# EAGLE board T01_Synth_Glove_v6.1 (EAGLE 7.1.0)
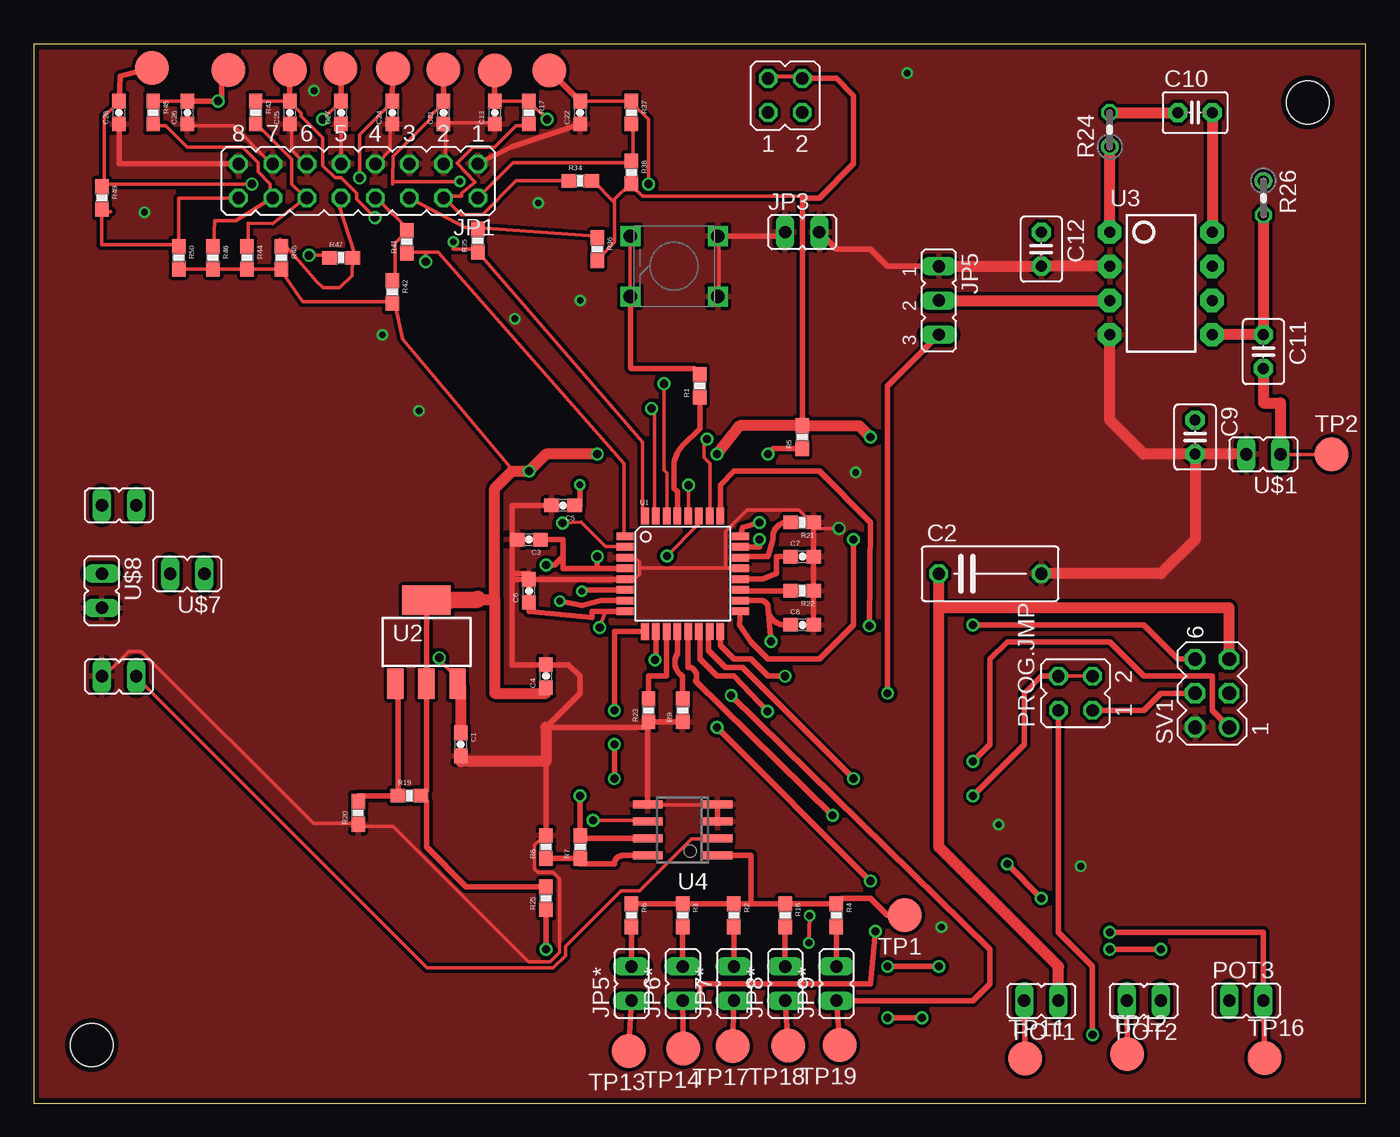
[diagram p0: board, top side]
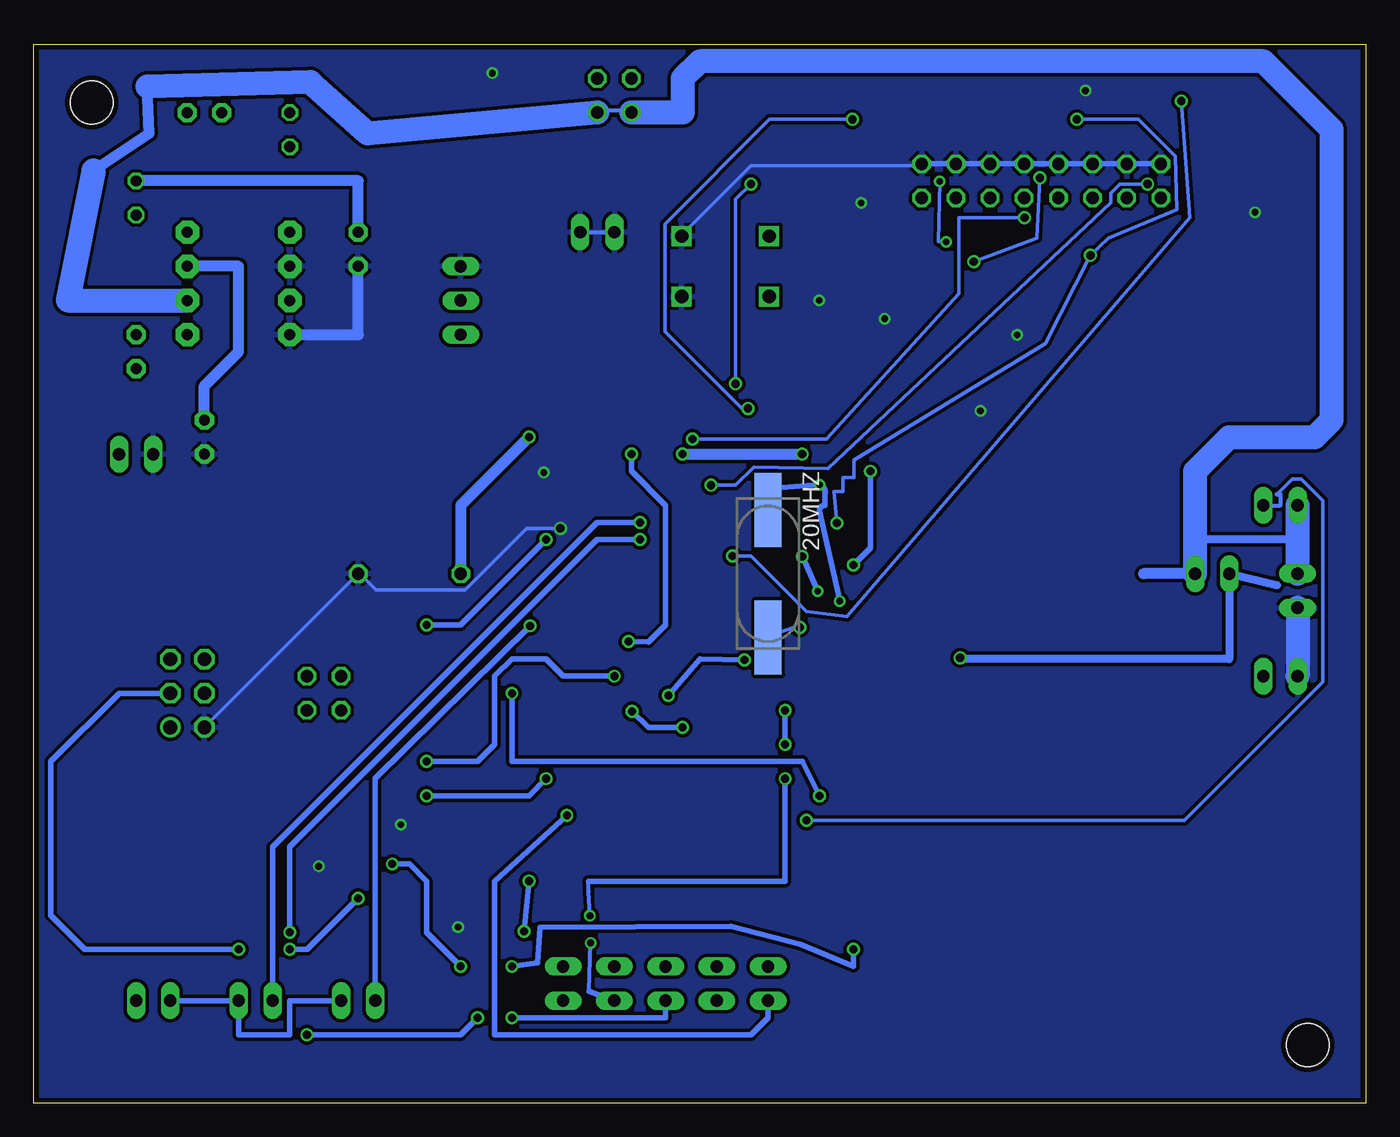
[diagram p1: board, bottom side, seen from below]

Size 99.06 x 78.74 mm. Coordinates in mm from the lower left corner, seen from the top.
Outline: 0,0 99.06,0 99.06,78.74 0,78.74 0,0
Copper layers (1*16): Top 0.0356mm / dielectric 1.5011mm / Bottom 0.0356mm
Design rules "OSH-Park-2-layer": minimum track width 6mil, minimum drill 13mil, track to track 6mil, track to pad 6mil, pad to pad 6mil, via to via 6mil, smd to smd 6mil, copper to edge 15mil, drill to drill 6mil, minimum pad ring 7mil, minimum via ring 7mil, stop-mask expansion 3mil, vias tented up to drill 0mil, thermal gap 10mil
Holes 3.2 mm at 4.32,4.32 94.74,74.42

## Footprints (pad centres in the part's own frame; a part is rotated, then mirrored left to right if it is on the bottom)
CSM-7X-DU = smd 5.5 x 2: 1 -4.75,0; 2 4.75,0
0603-CAP = smd 1.1 x 1: 1 -0.85,0; 2 0.85,0
C075-042X103 = drill 0.914 octagon: 1 -3.81,0; 2 3.81,0
C025-030X050 = drill 0.813 pad 1.422 octagon: 1 -1.27,0; 2 1.27,0
JP8Q = drill 0.914 octagon: 1 -8.89,-1.27; 2 -8.89,1.27; 3 -6.35,-1.27; 4 -6.35,1.27; 5 -3.81,-1.27; 6 -3.81,1.27; 7 -1.27,-1.27; 8 -1.27,1.27; 9 1.27,-1.27; 10 1.27,1.27; 11 3.81,-1.27; 12 3.81,1.27; 13 6.35,-1.27; 14 6.35,1.27; 15 8.89,-1.27; 16 8.89,1.27
JP1 = drill 0.914 long: 1 0,-1.27; 2 0,1.27
JP2Q = drill 0.914 octagon: 1 -1.27,-1.27; 2 1.27,-1.27; 3 -1.27,1.27; 4 1.27,1.27
JP2 = drill 0.914 long: 1 -2.54,0; 2 0,0; 3 2.54,0
0603-RES = smd 1.1 x 1: 1 -0.85,0; 2 0.85,0
0204V = drill 0.813 octagon: 1 -1.27,0; 2 1.27,0
MA03-2 = drill 1.016: 1 -2.54,-1.27 | drill 1.016 octagon: 2 -2.54,1.27; 3 0,-1.27; 4 0,1.27; 5 2.54,-1.27; 6 2.54,1.27
RESET_BUTTON = drill 0.991 square: 1 3.251,2.248; 2 3.251,-2.248; 3 -3.251,2.248; 4 -3.251,-2.248
B2,54 = smd 2.54 x 2.54: TP 0,0
TQFP32-08 = smd 1.27 x 0.559: 1 -4.293,2.8; 2 -4.293,2; 3 -4.293,1.2; 4 -4.293,0.4; 5 -4.293,-0.4; 6 -4.293,-1.2; 7 -4.293,-2; 8 -4.293,-2.8; 17 4.293,-2.8; 18 4.293,-2; 19 4.293,-1.2; 20 4.293,-0.4; 21 4.293,0.4; 22 4.293,1.2; 23 4.293,2; 24 4.293,2.8 | smd 0.559 x 1.27: 9 -2.8,-4.293; 10 -2,-4.293; 11 -1.2,-4.293; 12 -0.4,-4.293; 13 0.4,-4.293; 14 1.2,-4.293; 15 2,-4.293; 16 2.8,-4.293; 25 2.8,4.293; 26 2,4.293; 27 1.2,4.293; 28 0.4,4.293; 29 -0.4,4.293; 30 -1.2,4.293; 31 -2,4.293; 32 -2.8,4.293
SOT223 = smd 1.219 x 2.235: 1 -2.311,-3.099; 2 0,-3.099; 3 2.311,-3.099 | smd 3.6 x 2.2: 4 0,3.099
DIP08 = drill 0.813 pad 1.727 octagon: 1 -3.81,-3.81; 2 -1.27,-3.81; 3 1.27,-3.81; 4 3.81,-3.81; 5 3.81,3.81; 6 1.27,3.81; 7 -1.27,3.81; 8 -3.81,3.81
SO08 = smd 0.6 x 2.2: 1 -1.905,-2.6; 2 -0.635,-2.6; 3 0.635,-2.6; 4 1.905,-2.6; 5 1.905,2.6; 6 0.635,2.6; 7 -0.635,2.6; 8 -1.905,2.6

## Placement (x,y rotation side)
20MHZ  CSM-7X  [CSM-7X-DU]  44.45,39.37 270 bottom
C1  10u  [0603-CAP]  31.75,26.67 270 top
C2  100u  [C075-042X103]  71.12,39.37 0 top
C3  100n  [0603-CAP]  36.83,41.91 180 top
C4  100n  [0603-CAP]  38.1,31.75 90 top
C5  22p  [0603-CAP]  39.37,44.45 180 top
C6  22p  [0603-CAP]  36.83,38.1 90 top
C7  100n  [0603-CAP]  57.15,40.64 0 top
C8  100n  [0603-CAP]  57.15,35.56 0 top
C9  100n  [C025-030X050]  86.36,49.53 270 top
C10  10u  [C025-030X050]  86.36,73.66 0 top
C11  250u  [C025-030X050]  91.44,55.88 270 top
C12  50n  [C025-030X050]  74.93,63.5 270 top
C13  10n  [0603-CAP]  34.29,73.66 90 top
C21  10n  [0603-CAP]  30.48,73.66 90 top
C22  10n  [0603-CAP]  40.64,73.66 90 top
C24  10n  [0603-CAP]  26.67,73.66 90 top
C25  10n  [0603-CAP]  19.05,73.66 90 top
C26  10n  [0603-CAP]  11.43,73.66 90 top
C27  10n  [0603-CAP]  22.86,73.66 90 top
C28  10n  [0603-CAP]  6.35,73.66 90 top
JP1  0  [JP8Q]  24.13,68.58 180 top
JP1*  0  [JP1]  6.35,31.75 90 top
JP2  0  [JP2Q]  55.88,74.93 0 top
JP2*  0  [JP1]  6.35,44.45 270 top
JP3  0  [JP1]  57.15,64.77 270 top
JP5  0  [JP2]  67.31,59.69 270 top
JP5*  0  [JP1]  44.45,8.89 0 top
JP6*  0  [JP1]  48.26,8.89 0 top
JP7*  0  [JP1]  52.07,8.89 0 top
JP8*  0  [JP1]  55.88,8.89 0 top
JP9*  0  [JP1]  59.69,8.89 0 top
POT1  0  [JP1]  74.93,7.62 90 top
POT2  0  [JP1]  82.55,7.62 90 top
POT3  0  [JP1]  90.17,7.62 270 top
PROG.JMP  0  [JP2Q]  77.47,30.48 90 top
R1  330  [0603-RES]  49.53,53.34 90 top
R2  100k  [0603-RES]  52.07,13.97 270 top
R3  100k  [0603-RES]  48.26,13.97 270 top
R4  100k  [0603-RES]  59.69,13.97 270 top
R5  100k  [0603-RES]  57.15,49.53 90 top
R6  100k  [0603-RES]  44.45,13.97 270 top
R7  1k  [0603-RES]  40.64,19.05 90 top
R8  100k  [0603-RES]  38.1,19.05 90 top
R9  1k  [0603-RES]  48.26,29.21 90 top
R17  1k  [0603-RES]  36.83,73.66 270 top
R18  100k  [0603-RES]  55.88,13.97 270 top
R19  100  [0603-RES]  27.94,22.86 0 top
R20  330  [0603-RES]  24.13,21.59 90 top
R21  1k  [0603-RES]  57.15,43.18 180 top
R22  1k  [0603-RES]  57.15,38.1 180 top
R23  1k  [0603-RES]  45.72,29.21 90 top
R24  1.2k  [0204V]  80.01,72.39 90 top
R25  10k  [0603-RES]  38.1,15.24 90 top
R26  10  [0204V]  91.44,67.31 270 top
R34  1k  [0603-RES]  40.64,68.58 0 top
R35  1k  [0603-RES]  33.02,64.14 90 top
R36  1k  [0603-RES]  41.91,63.5 270 top
R37  1k  [0603-RES]  44.45,73.66 270 top
R38  1k  [0603-RES]  44.45,69.22 270 top
R41  1k  [0603-RES]  27.76,64.05 90 top
R42  1k  [0603-RES]  26.67,60.33 270 top
R43  1k  [0603-RES]  16.51,73.66 270 top
R44  1k  [0603-RES]  15.88,62.87 270 top
R45  1k  [0603-RES]  8.89,73.66 270 top
R46  1k  [0603-RES]  13.34,62.87 270 top
R47  1k  [0603-RES]  22.86,62.87 0 top
R48  1k  [0603-RES]  18.41,62.87 270 top
R49  1k  [0603-RES]  5.08,67.31 270 top
R50  1k  [0603-RES]  10.79,62.87 270 top
SV1  0  [MA03-2]  87.63,30.48 90 top
SW1  RESET_BUTTON  [RESET_BUTTON]  47.62,62.23 0 top
TP1  PTR1B2,54  [B2,54]  64.77,13.97 180 top
TP2  PTR1B2,54  [B2,54]  96.52,48.26 0 top
TP10  PTR1B2,54  [B2,54]  34.29,76.8 0 top
TP11  PTR1B2,54  [B2,54]  73.73,3.31 0 top
TP12  PTR1B2,54  [B2,54]  81.31,3.66 0 top
TP13  PTR1B2,54  [B2,54]  44.25,3.88 180 top
TP14  PTR1B2,54  [B2,54]  48.32,4.05 180 top
TP15  PTR1B2,54  [B2,54]  30.46,76.86 0 top
TP16  PTR1B2,54  [B2,54]  91.52,3.34 0 top
TP17  PTR1B2,54  [B2,54]  51.98,4.26 180 top
TP18  PTR1B2,54  [B2,54]  56.11,4.29 180 top
TP19  PTR1B2,54  [B2,54]  59.95,4.31 180 top
TP20  PTR1B2,54  [B2,54]  38.34,76.8 0 top
TP22  PTR1B2,54  [B2,54]  26.73,76.92 0 top
TP23  PTR1B2,54  [B2,54]  19.07,76.84 0 top
TP24  PTR1B2,54  [B2,54]  14.48,76.83 0 top
TP25  PTR1B2,54  [B2,54]  22.82,76.92 0 top
TP26  PTR1B2,54  [B2,54]  8.79,76.99 0 top
U1  ATMEGA328P  [TQFP32-08]  48.26,39.37 0 top
U2  ZLDO1117  [SOT223]  29.21,34.29 0 top
U3  LM386  [DIP08]  83.82,60.96 270 top
U4  LT1013  [SO08]  48.26,20.32 90 top
U$1  SPEAKER  [JP1]  91.44,48.26 90 top
U$7  POWER_SWITCH  [JP1]  11.43,39.37 90 top
U$8  9VOLTBATTERY  [JP1]  5.08,38.1 180 top

## Library data of the parts
20MHZ = crystal; OC_FARNELL: unknown; OC_NEWARK: unknown
C1 C3-C8 C13 C21 C22 C24-C28 = SparkFun-Capacitors
C2 C9-C12 R24 R26 = adafruit
JP1 JP1* JP2 JP2* JP3 JP5 JP5* JP6* JP7* JP8* JP9* POT1-POT3 PROG.JMP = jumper
R1-R9 R17-R23 R25 R34-R38 R41-R50 = SparkFun-Resistors
SV1 = con-lstb; OC_FARNELL: unknown; OC_NEWARK: unknown
SW1 U2 U4 U$1 U$7 U$8 = Synth_Glove
TP1 TP2 TP10-TP20 TP22-TP26 = testpad
U1 = SparkFun-DigitalIC; PROD_ID: IC-09069
U3 = SparkFun-AnalogIC

## Nets
+5V: C2.1 C3.1 C4.1 JP2.3 JP2.4 POT1.1 POT2.1 POT3.1 R5.2 R19.2 R25.2 R34.2 R36.2 R38.2 R42.2 R44.2 R46.2 R48.2 R50.2 SV1.5 U1.4 U1.6 U2.2 U2.4
+9V: JP2*.1 JP2.1 JP2.2 U3.6 U$7.1 U$8.1
A0: POT1.2 TP11.TP U1.25
A1: POT2.2 TP12.TP U1.24
A2: POT3.2 TP16.TP U1.23
D0: C22.2 R37.1 TP20.TP U1.30
D1: C13.2 R17.1 TP10.TP U1.31
D2: C21.2 R35.1 TP15.TP U1.32
D3: C24.2 R41.1 TP22.TP U1.1
D4: C27.2 R47.1 TP25.TP U1.2
D5: C25.2 R43.1 TP23.TP U1.26
D6: C26.2 R45.1 TP24.TP U1.27
D7: C28.2 R49.1 TP26.TP U1.28
GND: C1.2 C2.2 C3.2 C4.2 C5.2 C6.2 C7.2 C8.2 C9.2 C12.2 C13.1 C21.1 C22.1 C24.1 C25.1 C26.1 C27.1 C28.1 JP1*.2 JP1.1 JP1.3 JP1.5 JP1.7 JP1.9 JP1.11 JP1.13 JP1.15 JP3.1 JP3.2 JP5.1 R8.2 R9.1 R20.1 R21.1 R22.1 R23.1 SV1.2 SW1.1 SW1.2 U1.3 U1.5 U1.21 U3.2 U3.4 U4.3 U4.4 U4.5 U$1.2 U$8.2
MISO: SV1.1 U1.16
MOSI: PROG.JMP.1 SV1.4
N$1: C7.1 U1.20
N$2: JP1.8 R41.2 R42.1
N$3: JP1.12 R43.2 R44.1
N$4: R1.1 U1.29
N$6: 20MHZ.1 C5.1 U1.7
N$7: 20MHZ.2 C6.1 U1.8
N$8: C8.1 R5.1 U1.18
N$9: R21.2 U1.22
N$10: R22.2 U1.19
N$13: JP1.6 R35.2 R36.1
N$16: R7.1 R8.1 U4.8
N$17: R9.2 U1.12
N$18: JP5*.2 R6.2
N$21: JP9*.2 R4.2
N$22: R1.2 SW1.3 SW1.4
N$23: JP1.4 R17.2 R34.1
N$25: JP8*.2 R18.2
N$27: C10.1 R24.2
N$31: C11.2 TP2.TP U$1.1
N$32: JP7*.2 R2.2
N$34: JP2*.2 U4.6
N$36: JP5.3 R7.2 U4.7
N$37: R19.1 R20.2 U2.1
N$38: C1.1 U2.3 U$7.2
N$39: JP6*.2 R3.2
N$40: R24.1 U3.1
N$41: C10.2 U3.8
N$43: JP1.2 R37.2 R38.1
N$44: JP5.2 U3.3
N$47: C9.1 U3.7
N$49: C11.1 R26.2 U3.5
N$50: C12.1 R26.1
N$51: JP1.14 R45.2 R46.1
N$52: JP1.10 R47.2 R48.1
N$53: JP1.16 R49.2 R50.1
PB0: JP5*.1 TP13.TP U1.13
PB1: JP6*.1 TP14.TP U1.14
PB2: JP7*.1 PROG.JMP.3 TP17.TP
PB3: JP8*.1 TP18.TP U1.9
PB3/MOSI: PROG.JMP.2 PROG.JMP.4 U1.15
PB4: JP9*.1 TP19.TP U1.10
PD7: R23.2 U1.11
RESET: R25.1 SV1.3
SCK: SV1.6 U1.17
SUMS: R2.1 R3.1 R4.1 R6.1 R18.1 TP1.TP U4.1
V-: JP1*.1 U4.2

## Tracks (layer width: path | path; a pad name or v marks a point on that pad's centre or on a via)
+5V  (via drill 0.5, 0.6)
  Top 0.254: R50.2 10.92,62.03 13.21,62.03 R46.2 13.44,62.03 15.72,62.03 R44.2 15.95,62.03 18.24,62.03 R48.2 18.47,61.8 20.02,59.61 26.64,59.61 R42.2 26.87,59.38 27.43,56.8 35.43,47.32 35.56,46.99 | 43.2,66.98 43.2,67.21 44.35,68.35 R38.2 44.58,68.35 44.58,68.12 45.26,67.44 57.15,67.44 57.15,67.31 | 43.2,66.98 43.2,64.01 42.06,62.87 R36.2 | 43.2,66.98 41.6,68.58 R34.2 | U2.2 29.26,31.32 29.21,31.32
  Top 0.305: JP2.4 57.15,76.35 54.63,76.35 54.63,76.2 JP2.3
  Top 0.406: U2.4 29.21,31.32 U2.2 29.21,23.28 R19.2 29.21,22.44 29.21,19.05 32.17,16.09 R25.2 | C3.1 39.37,41.91 39.37,40.64 | 39.37,40.64 39.37,39.77 41.91,39.77 | U1.4 41.91,39.77 | U1.6 40.81,38.17 40.81,38.07 v40.76,38.06 | v41.91,40.64 41.91,39.77 | R5.2 57.15,67.31 58.42,67.31 60.96,69.85 60.96,74.93 59.69,76.2 JP2.4 | v38.1,40.01 38.73,40.01 39.37,40.64
  Top 0.813: POT1.1 76.2,10.16 67.31,19.05 67.31,36.83 | 67.31,36.83 C2.1 | 33.02,37.47 34.29,37.47 | 34.29,37.47 34.29,30.48 38.1,30.48 C4.1 | v62.23,49.53 61.38,50.38 R5.2 52.49,50.38 v50.8,48.26 | v41.91,48.26 38.1,48.26 v36.83,46.99 35.56,46.99 34.29,45.72 34.29,37.47 | SV1.5 88.9,36.83 67.31,36.83
  Top 1.27: U2.4 33.02,37.47
  Bottom 0.406: POT3.1 POT2.1 83.82,5.08 80.01,5.08 80.01,7.62 POT1.1 | v40.76,38.06 v41.91,40.64 | v36.83,46.99 36.83,41.27 v38.1,40.01
  Bottom 0.813: v62.23,49.53 67.31,44.45 C2.1 | v50.8,48.26 v41.91,48.26
+9V
  Bottom 0.254: 55.32,73.84 JP2.1 | 56.46,73.84 JP2.2
  Bottom 0.305: 56.46,73.84 54.61,73.84 JP2.1
  Bottom 0.61: 5.08,41.91 12.7,41.91
  Bottom 0.813: U$7.1 16.51,39.37 | 94.6,69.37 90.47,72.11 90.6,75.6
  Bottom 1.778: U$8.1 5.08,41.91 JP2*.1 | U$7.1 12.7,41.91 12.7,46.99 10.16,49.53 3.81,49.53 2.54,50.8 2.54,72.39 7.62,77.47 49.53,77.47 50.8,76.2 50.8,73.66 JP2.1 | JP2.2 74.22,72.11 78.49,75.92 90.6,75.6 | 94.6,69.37 96.52,59.69 U3.6
A0  (via drill 0.6)
  Top 0.406: TP11.TP POT1.2 | v62.15,35.5 62.23,43.18 58.42,46.99 52.07,46.99 51.06,45.98 U1.25
  Bottom 0.406: POT1.2 73.66,24.13 v62.15,35.5
A1  (via drill 0.6)
  Top 0.406: U1.24 52.7,42.8 v53.98,43.18 | TP12.TP POT2.2
  Bottom 0.406: v53.98,43.18 57.15,43.18 81.28,19.05 POT2.2
A2  (via drill 0.6)
  Top 0.406: U1.23 53.98,41.37 v53.98,41.91 | v80.01,12.7 91.44,12.7 POT3.2 91.51,5.44 TP16.TP
  Bottom 0.406: v53.98,41.91 57.15,41.91 80.01,19.05 v80.01,12.7
D0  (via drill 0.61)
  Top 0.254: C22.2 40.69,74.52 44.35,74.52 R37.1 44.58,74.3 45.72,73.15 v45.72,68.35 | v46.86,53.49 46.86,47.09 47.09,46.86 47.09,43.66 U1.30
  Top 0.406: TP20.TP C22.2
  Bottom 0.254: v46.86,53.49 46.86,67.21 v45.72,68.35
D1  (via drill 0.61)
  Top 0.254: 34.29,74.52 36.8,74.52 R17.1 37.03,74.3 v38.18,73.15 | v45.95,51.66 46.18,51.44 46.18,43.66 U1.31
  Top 0.406: TP10.TP 34.29,74.52 C13.2
  Bottom 0.254: v45.95,51.66 46.41,51.66 52.12,57.38 52.12,65.38 44.35,73.15 v38.18,73.15
D2  (via drill 0.5)
  Top 0.254: 26.71,68.61 26.75,70.41 29.49,73.15 29.49,73.38 30.4,74.3 C21.2 | 26.71,68.61 26.7,68.35 | U1.32 45.26,43.66 45.26,49.15 33.05,63.27 R35.1 32.82,63.5 31.2,63.5 v31.2,64.05 | v31.69,68.53 26.71,68.52 26.71,68.61
  Top 0.406: TP15.TP C21.2
  Bottom 0.254: v31.2,64.05 31.77,64.05 v31.69,68.53
D3  (via drill 0.61)
  Top 0.254: 26.67,74.93 26.75,74.75 26.75,74.52 C24.2 26.52,74.3 24.23,72.01 v24.23,68.81 | 29.16,63.27 30.07,63.27 43.89,47.55 43.89,42.29 U1.1 | 29.16,63.27 28.02,63.27 R41.1 | 29.16,63.27 v29.16,62.59
  Top 0.406: TP22.TP 26.67,74.93
  Bottom 0.254: v24.23,68.81 24.47,64.33 v29.16,62.59
D4  (via drill 0.61)
  Top 0.254: v20.47,63.04 21.84,63.04 R47.1 | 22.86,74.52 v21.49,73.15 | v39.32,43.15 40.69,43.2 42.52,41.38 43.89,41.38 U1.2
  Top 0.406: TP25.TP 22.86,74.52 C27.2
  Bottom 0.254: v21.49,73.15 16.92,73.15 14.17,70.41 14.06,66.46 19.15,64.31 v20.47,63.04 23.82,56.47 38.05,47.81 38.05,46.51 38.87,46.51 38.87,45.49 39.55,45.49 v39.32,43.15
D5  (via drill 0.61)
  Top 0.254: R43.1 16.69,74.52 18.97,74.52 C25.2 19.2,74.3 19.89,73.61 19.89,73.38 21.49,71.78 21.49,69.72 22.4,68.81 22.86,68.81 24,67.67 24,67.21 v25.38,65.84 | v50.06,49.38 49.84,49.15 49.84,48.01 50.29,47.55 50.29,43.66 U1.26
  Top 0.406: TP23.TP C25.2
  Bottom 0.254: v50.06,49.38 40.1,49.38 30.27,60.19 30.27,65.84 v25.38,65.84
D6  (via drill 0.61)
  Top 0.254: R45.1 8.91,74.52 11.43,74.52 C26.2 | v47.09,40.69 49.38,42.98 49.38,43.66 U1.27 | v13.72,74.52 v13.72,74.51
  Top 0.406: TP24.TP 13.97,76.2 13.97,74.51 v13.72,74.51 C26.2
  Bottom 0.254: v47.09,40.69 45.72,40.69 41.6,36.58 38.57,36.18 13.09,65.84 v13.72,74.52
D7  (via drill 0.61)
  Top 0.254: 5.26,68.35 5.26,73.38 6.17,74.3 C28.2 | v48.69,45.95 48.69,43.66 U1.28 | 5.26,68.35 v16.23,68.35 | 5.26,68.35 R49.1
  Top 0.406: TP26.TP 6.43,76.35 C28.2
  Bottom 0.254: v48.69,45.95 46.86,45.95 45.49,47.32 39.98,47.2 18.97,66.98 18.97,67.67 18.29,68.35 v16.23,68.35
GND  (via drill 0.5, 0.61)
  Top 0.254: JP1*.2 5.26,31.77 7.09,33.6 8,33.6 20.8,20.8 24,20.8 R20.1 24.23,20.57 26.75,20.57 36.8,10.52 38.41,10.52 39.09,11.2 39.09,16.69 38.63,17.14 37.49,17.14 37.26,17.37 37.26,19.2 37.95,19.89 R8.2 | 45.03,39.78 45.03,39.32 44.81,39.09 44.12,39.09 U1.5 | 45.03,39.78 45.03,40.23 44.81,40.46 44.12,40.46 U1.3 | 45.03,39.78 51.44,39.78 | 51.44,39.78 52.35,39.78 U1.21 | U4.4 50.75,22.17 45.72,22.17 U4.5 | 51.44,39.78 51.44,42.52 53.03,44.12 56.92,44.12 57.84,43.2 R21.1 58.06,42.75 v59.89,42.75 | C26.1 11.43,72.69 14.86,72.69 17.6,69.95 JP1.13 | C24.1 26.52,72.69 26.52,70.87 25.6,69.95 JP1.7 | JP1.9 C27.1 | C25.1 19.2,72.69 19.2,70.87 20.12,69.95 JP1.11 | JP1.3 30.63,69.95 30.63,72.69 C21.1 30.63,72.92 34.29,72.92 C13.1 | SW1.2 50.98,60.12 50.98,64.47 SW1.1
  Top 0.406: R21.1 C7.2 R22.1 C8.2 | C6.2 43.95,38.95 U1.5 | C6.2 36.83,39.37 35.56,39.37 35.56,32.6 C4.2 39.79,32.6 40.64,31.75 40.64,30.48 38.1,27.94 45.3,27.94 arc90 R23.1 | C6.2 35.56,38.95 35.56,41.91 | C3.2 35.56,41.91 | 35.56,41.91 35.56,44.45 C5.2 | R23.1 R9.1 | R23.1 arc90 45.66,28.3 U4.5 | U4.3 U4.4 | R8.2 38.1,25.4 | SW1.1 55.59,64.48 JP3.1 | JP5.1 63.5,62.23 62.23,63.5 59.69,63.5 JP3.2 | C22.1 35.56,71.12 JP1.1 | C28.1 6.35,69.85 JP1.15
  Top 0.813: JP5.1 C12.2 U3.2 | U$1.2 C9.2 | C9.2 86.36,41.91 83.82,39.37 C2.2 | C9.2 82.55,48.26 80.01,50.8 U3.4 | 38.1,27.94 38.1,25.4 31.75,25.4 C1.2
  Bottom 0.254: JP1.5 28.12,69.95 28.12,69.85 | JP1.11 20.34,69.95 20.34,69.85 | 22.86,69.95 JP1.9 | JP1.7 25.6,69.95 25.6,69.85 | JP1.13 17.83,69.95 17.83,69.85 | SV1.2 C2.2 74.75,39.32 73.61,38.18 66.98,38.18 62.41,42.75 v59.89,42.75 | 56.01,64.92 JP3.1 | JP1.1 33.15,69.72 45.72,69.72 50.75,64.69 SW1.1
  Bottom 0.305: JP3.2 JP3.1
  Bottom 0.406: JP1.15 JP1.13 17.83,69.85 JP1.11 20.34,69.85 JP1.9 JP1.7 25.6,69.85 JP1.5 28.12,69.85 JP1.3 JP1.1
  Bottom 0.813: U3.4 74.93,57.15 C12.2
  Bottom 1.778: U$8.2 JP1*.2
  other vias: 40.64,59.69 28.66,51.49 67.5,13.09 71.75,20.72 64.96,76.59 25.93,57.12 8.25,66.25 35.78,58.34 37.52,66.95 20.85,75.29 61.12,46.9 77.86,17.62
  pour Bottom (isolate 0.254): 0,0 99.06,0 99.06,1.27 99.06,78.74 0,78.74
  pour Top (isolate 0.254): 0,0 99.06,0 99.06,78.74 0,78.74
MISO  (via drill 0.6)
  Top 0.406: SV1.1 87.63,29.21 87.63,31.75 82.55,31.75 80.01,34.29 72.39,34.29 71.12,33.02 71.12,26.67 v69.85,25.4 | U1.16 51.06,34.03 52.07,33.02 53.34,33.02 54.61,31.75 v55.88,31.75
  Bottom 0.406: v69.85,25.4 66.04,25.4 64.77,26.67 64.77,31.75 63.5,33.02 60.96,33.02 59.69,31.75 v55.88,31.75
MOSI
  Top 0.406: PROG.JMP.1 82.55,29.21 83.82,30.48 SV1.4
N$1
  Top 0.254: C7.1 56.24,40.69 56.01,40.69 55.88,40.64
  Top 0.406: U1.20 54.21,38.97 55.24,39.37 55.24,40.64 55.88,40.64
N$2
  Top 0.254: R42.1 26.87,61.21 26.87,63.96 27.79,64.87 R41.2 27.79,65.1 26.52,66.29 25.6,67.21 JP1.8
N$3
  Top 0.254: R44.1 15.95,63.86 15.96,65.45 17.78,65.41 20.12,67.21 JP1.12 20.12,67.44 19.2,68.35 19.2,70.18 16.69,72.69 R43.2
N$4
  Top 0.406: R1.1 49.53,50.16 48.26,48.9 arc53 47.62,46.99 47.62,45.72 47.86,45.48 U1.29
N$6  (via drill 0.5, 0.5 pad 0.25)
  Top 0.406: C5.1 40.64,44.45 v40.62,45.99 | U1.7 42.21,37.37 40.77,37.02 v39.12,37.34
  Bottom 0.254: 44.35,45.72 44.35,44.35 20MHZ.1
  Bottom 0.406: 44.45,45.72 44.35,45.72 v40.62,45.99 arc90 40.22,45.3 C5.1 arc-90 40.64,44.03 v39.12,37.34
N$7  (via drill 0.61)
  Top 0.254: C6.1 36.8,37.03 36.8,36.8 36.83,36.8 | v42.1,35.37 42.52,36.57 42.52,36.58
  Top 0.406: U1.8 42.52,36.57 41.53,36.57 41.53,36.11 36.83,36.57 36.83,36.8 36.83,36.83
  Bottom 0.254: v42.1,35.37 42.55,35.37 44.35,34.75 20MHZ.2
N$8  (via drill 0.6)
  Top 0.254: C8.1 56.24,35.66 56.01,35.66 55.88,35.56
  Top 0.406: U1.18 54.07,37.37 arc-90 54.61,36.83 | 54.61,36.83 arc90 55.88,35.56 | R5.1 55.03,48.68 v54.61,48.26 | v54.82,34.32 54.61,36.83
  Bottom 0.406: v54.61,48.26 54.61,46.99 52.07,44.45 52.07,35.56 53.34,34.29 v54.82,34.32
N$9
  Top 0.406: U1.22 52.62,40.64 54.61,40.64 54.98,41.9 arc-90 55.88,43.18 R21.2
N$10
  Top 0.406: U1.19 arc90 52.62,38.1 R22.2
N$13
  Top 0.254: JP1.6 28.12,67.21 32.13,65.1 32.82,65.1 R35.2 33.05,65.1 41.83,64.47 R36.1
N$16
  Top 0.406: U4.8 43.81,18.41 arc90 43.18,17.78 40.64,17.78 R7.1 R8.1
N$17
  Top 0.406: R9.2 48.26,31.75 arc-90 47.86,33.42 U1.12
N$18
  Top 0.406: JP5*.2 R6.2
N$21
  Top 0.406: JP9*.2 R4.2
N$22
  Top 0.254: SW1.3 44.35,64.47 44.35,60.12 SW1.4
  Top 0.406: SW1.4 44.37,54.69 44.45,54.61 49.11,54.61 R1.2
N$23
  Top 0.254: R34.1 35.89,68.58 33.38,66.06 31.77,66.06 30.63,67.21 JP1.4 30.63,67.44 31.82,67.44 31.82,67.68 32.82,68.5 31.49,69.89 32.69,71.09 34.29,71.09 35.89,72.69 36.8,72.69 R17.2
N$25
  Top 0.406: JP8*.2 R18.2
N$27
  Top 0.813: R24.2 C10.1
N$31
  Top 0.254: TP2.TP 96.47,48.23 93.04,48.23 U$1.1
  Top 0.813: C11.2 91.44,52.07 92.71,52.07 U$1.1
N$32
  Top 0.406: JP7*.2 R2.2
N$34  (via drill 0.61)
  Top 0.254: v41.6,21.03 45.49,21.03 U4.6
  Bottom 0.254: v41.6,21.03 13.49,21.03 3.2,31.32 3.2,44.81 4.8,46.41 5.49,46.41 6.63,45.26
  Bottom 0.305: JP2*.2 6.35,44.45 6.35,45.26 6.63,45.26
N$36  (via drill 0.6)
  Top 0.406: U4.7 41.27,19.68 arc-90 40.64,20.32 R7.2 v40.64,22.86 | v63.5,30.48 63.5,53.34 JP5.3
  Bottom 0.406: v40.64,22.86 41.91,25.4 63.5,25.4 v63.5,30.48
N$37
  Top 0.254: U2.1 26.75,31.09 26.75,30.63 26.67,30.48
  Top 0.406: 26.67,30.48 27.09,30.06 R19.1 24.13,22.86 R20.2
N$38  (via drill 0.61)
  Top 0.254: C1.1 31.77,27.66 31.75,27.94 | v30.16,33.12 30.18,32.92 31.55,31.55 U2.3
  Top 0.813: U2.3 arc-90 31.75,30.96 31.75,27.94
  Bottom 0.61: 10.16,38.86 10.16,33.02 30.16,33.02 v30.16,33.12 | 10.13,38.86 10.16,38.86 | 10.16,38.86 U$7.2 6.61,38.52
N$39
  Top 0.406: JP6*.2 R3.2
N$40
  Top 0.813: U3.1 R24.1
N$41
  Top 0.813: C10.2 U3.8
N$43
  Top 0.254: R37.2 44.58,72.69 44.58,70.18 R38.1 44.35,69.95 35.66,69.95 JP1.2
N$44
  Top 0.813: JP5.2 U3.3
N$47
  Bottom 0.813: C9.1 86.36,53.34 83.82,55.88 83.82,62.23 U3.7
N$49
  Top 0.813: R26.2 C11.1 U3.5
N$50
  Bottom 0.813: C12.1 74.93,68.58 R26.1
N$51
  Top 0.254: R46.1 13.44,63.86 13.44,64.77 13.45,65.64 15.09,65.64 15.09,65.65 17.6,67.21 JP1.14 17.6,67.44 17.6,68.35 16.69,69.27 16.69,69.95 15.54,71.09 11.43,71.09 9.83,72.69 8.91,72.69 R45.2
N$52
  Top 0.254: R48.1 18.31,64.25 21.06,61.09 21.51,60.63 22.76,60.63 23.67,61.54 R47.2 23.9,63.04 22.63,66.98 22.86,67.21 JP1.10
N$53
  Top 0.254: R49.2 5.26,66.29 5.71,66.29 5.08,66.04 5.08,63.86 10.69,63.86 R50.1 10.92,63.86 10.79,63.86 10.79,67.31 JP1.16 | JP1.16 15.09,66.75 15.09,67.21 JP1.16
PB0  (via drill 0.6)
  Top 0.406: TP13.TP JP5*.1 | v59.41,21.4 49.23,31.41 arc90 48.9,32.38 48.66,32.38 U1.13
  Bottom 0.406: JP5*.1 44.45,6.35 45.72,5.08 64.77,5.08 64.77,16.51 v59.41,21.4
PB1  (via drill 0.6)
  Top 0.406: TP14.TP JP6*.1 49.53,7.62 49.53,8.89 62.23,8.89 v62.58,12.77 | v62.23,16.51 v50.8,27.94 | v54.57,29.14 52.07,31.75 50.8,31.75 49.53,33.02 49.53,35.01 U1.14
  Bottom 0.406: v62.58,12.77 v62.23,16.51 | v50.8,27.94 53.34,27.94 v54.57,29.14
PB2  (via drill 0.6)
  Top 0.406: TP17.TP JP7*.1 | PROG.JMP.3 76.2,12.7 78.74,10.16 v78.74,5.08 | v66.04,6.35 v63.5,6.35
  Bottom 0.406: v78.74,5.08 67.31,5.08 v66.04,6.35 | v63.5,6.35 52.07,6.35 JP7*.1
PB3  (via drill 0.5, 0.6)
  Top 0.305: v57.65,11.91 57.73,13.8 v57.7,13.93
  Top 0.406: TP18.TP JP8*.1 | v43.18,24.13 v43.18,26.67 | v43.18,29.21 43.18,35.08 U1.9
  Bottom 0.305: 57.77,8.33 57.78,8.33 v57.65,11.91 | v57.7,13.93 57.78,15.73 57.78,16.51
  Bottom 0.406: JP8*.1 57.77,8.33 | 57.78,16.51 43.18,16.51 v43.18,24.13 | v43.18,26.67 v43.18,29.21
PB3/MOSI  (via drill 0.6)
  Top 0.254: PROG.JMP.2 78.64,31.77 76.35,31.77 PROG.JMP.4
  Top 0.406: PROG.JMP.4 74.93,31.75 73.66,30.48 73.66,26.67 v69.85,22.86 | v60.96,24.13 52.7,32.38 51.44,32.38 50.16,33.66 50.16,34.98 U1.15
  Bottom 0.406: v69.85,22.86 62.23,22.86 v60.96,24.13
PB4  (via drill 0.6)
  Top 0.406: TP19.TP JP9*.1 69.85,7.62 71.12,8.89 71.12,11.43 v51.87,30.31 | v46.2,32.95 46.26,33.12 U1.10
  Bottom 0.406: v51.87,30.31 49.53,33.02 v46.2,32.95
PD7
  Top 0.406: R23.2 45.72,31.75 46.99,31.75 arc90 47.06,31.82 U1.11
RESET  (via drill 0.6)
  Top 0.406: v83.82,11.43 v80.01,11.43 | v74.93,15.24 v72.39,17.78 | v67.31,10.16 v63.5,10.16 | v38.1,11.43 R25.1
  Bottom 0.406: SV1.3 92.71,30.48 97.79,25.4 97.79,13.97 95.25,11.43 v83.82,11.43 | v80.01,11.43 78.74,11.43 v74.93,15.24 | v72.39,17.78 71.12,17.78 69.85,16.51 69.85,12.7 v67.31,10.16 | v63.5,10.16 61.6,10.45 61.41,13.06 47.21,13.16 42.02,11.82 38.1,10.16 v38.1,11.43
SCK  (via drill 0.6)
  Top 0.406: SV1.6 85.09,33.02 82.55,35.56 v69.85,35.56 | v60.96,41.91 60.96,35.56 58.42,33.02 54.61,33.02 53.34,34.29 52.48,35.56 U1.17
  Bottom 0.406: v69.85,35.56 67.31,35.56 v60.96,41.91
SUMS
  Top 0.406: R6.1 R3.1 R2.1 53.34,14.82 | TP1.TP 63.5,13.97 62.23,15.24 60.11,15.24 R4.1 R18.1 53.34,14.82 | U4.1 53.34,18.41 53.34,14.82
V-
  Top 0.254: U4.2 50.75,19.66 48.92,19.66 45.03,15.77 43.66,15.77 39.55,11.66 39.55,10.97 38.63,10.06 29.26,10.06 7.77,31.55 JP1*.1

## Text on the board
Name: 9V | GND